# Altium PCB 5025_拼.PcbDoc
Units mm, origin at the board's own origin, x right, y up, seen from the top; angles counter-clockwise.
Board outline 100 x 100 mm, 2 copper layers (Top Layer, Bottom Layer); 136 components, 0 nets, 304 pads, 1408 vias.
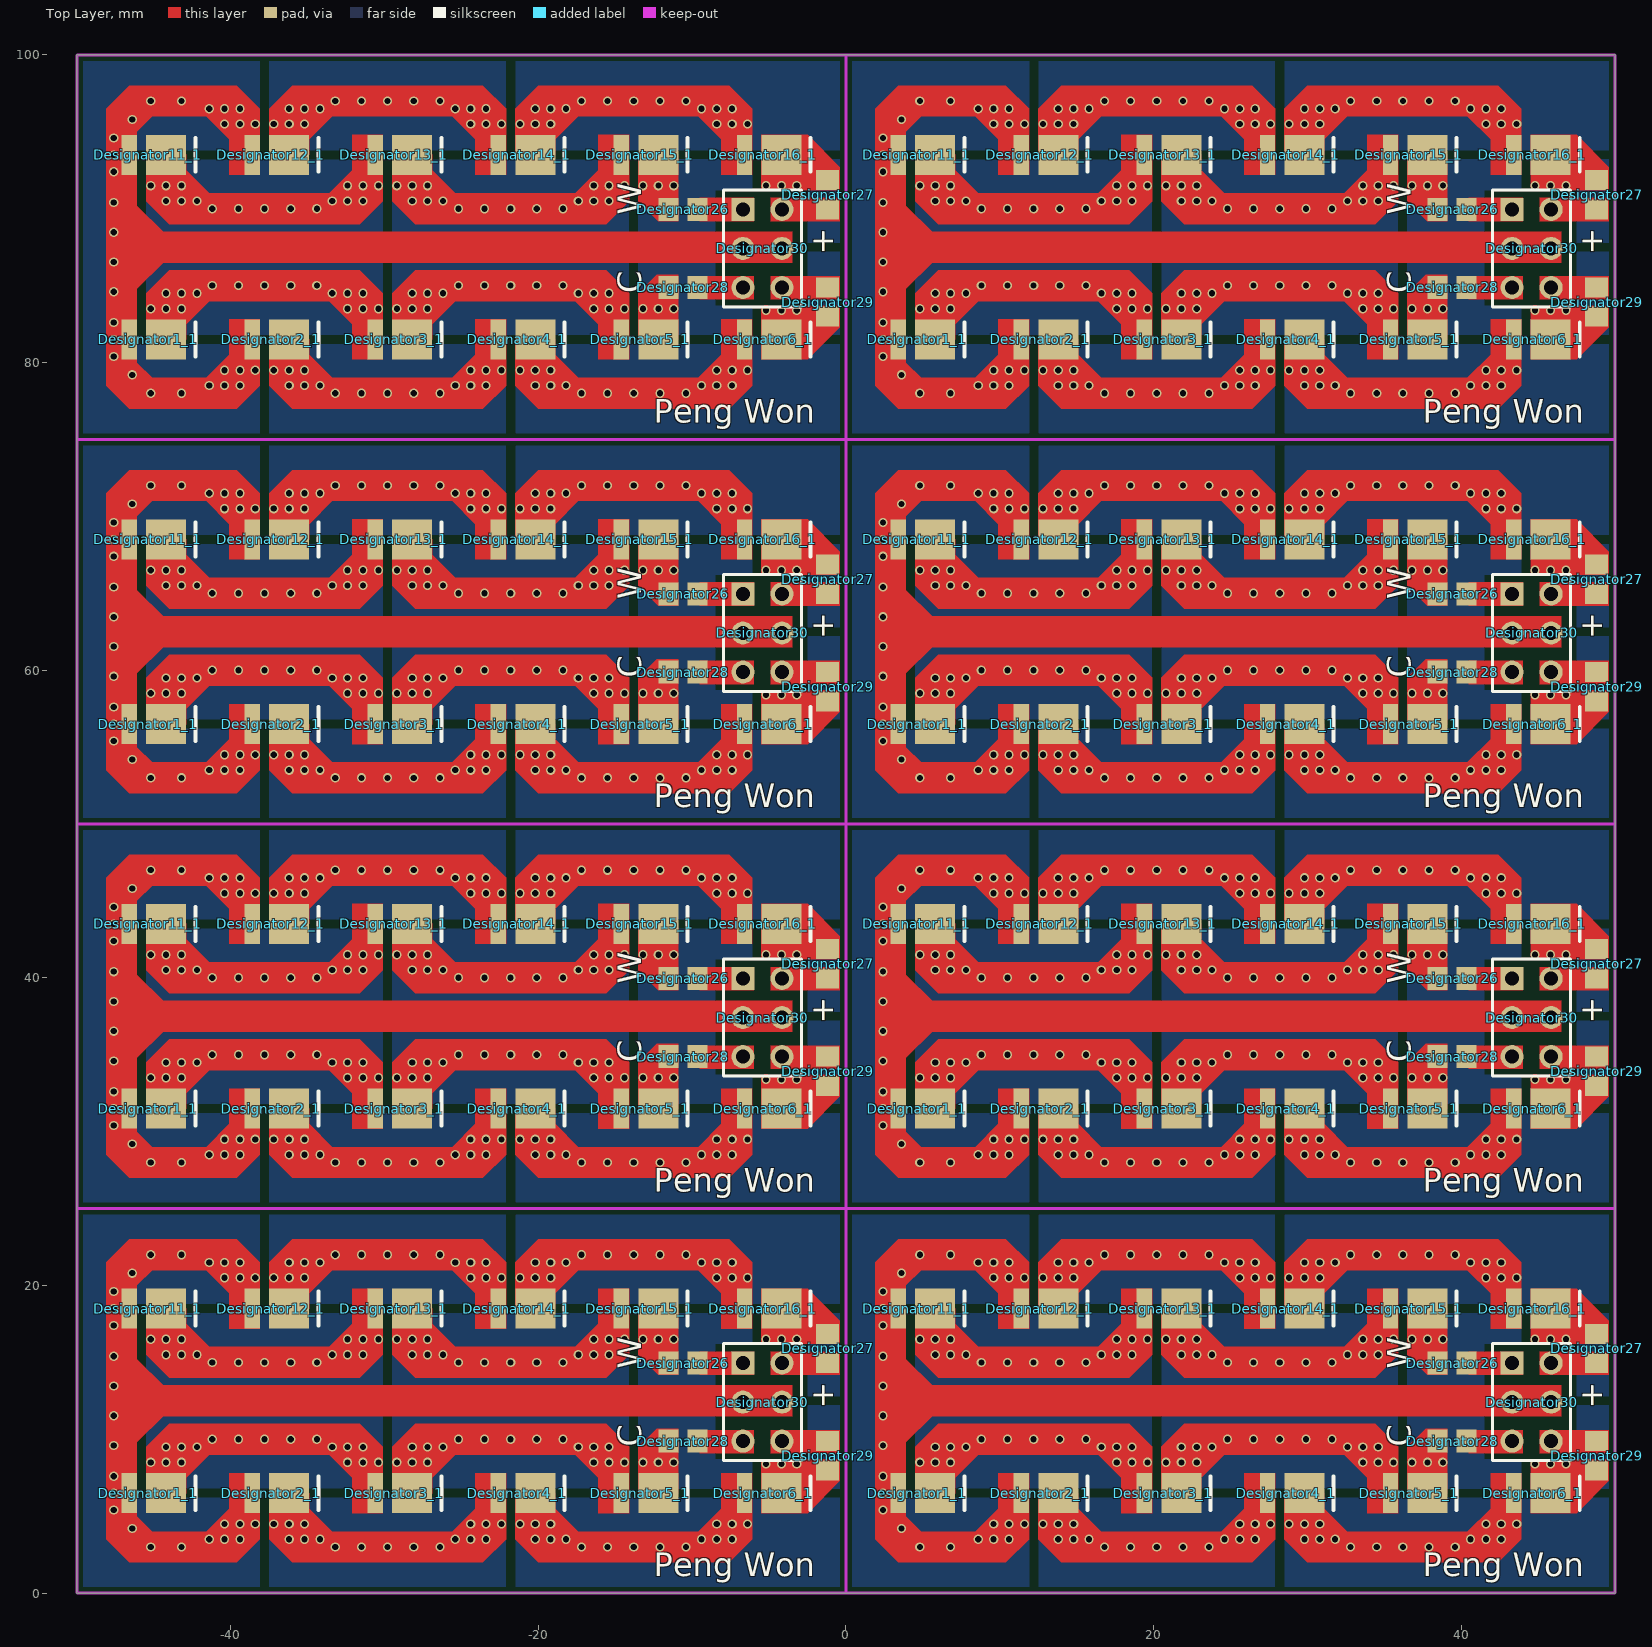
[diagram p0: Top Layer view]
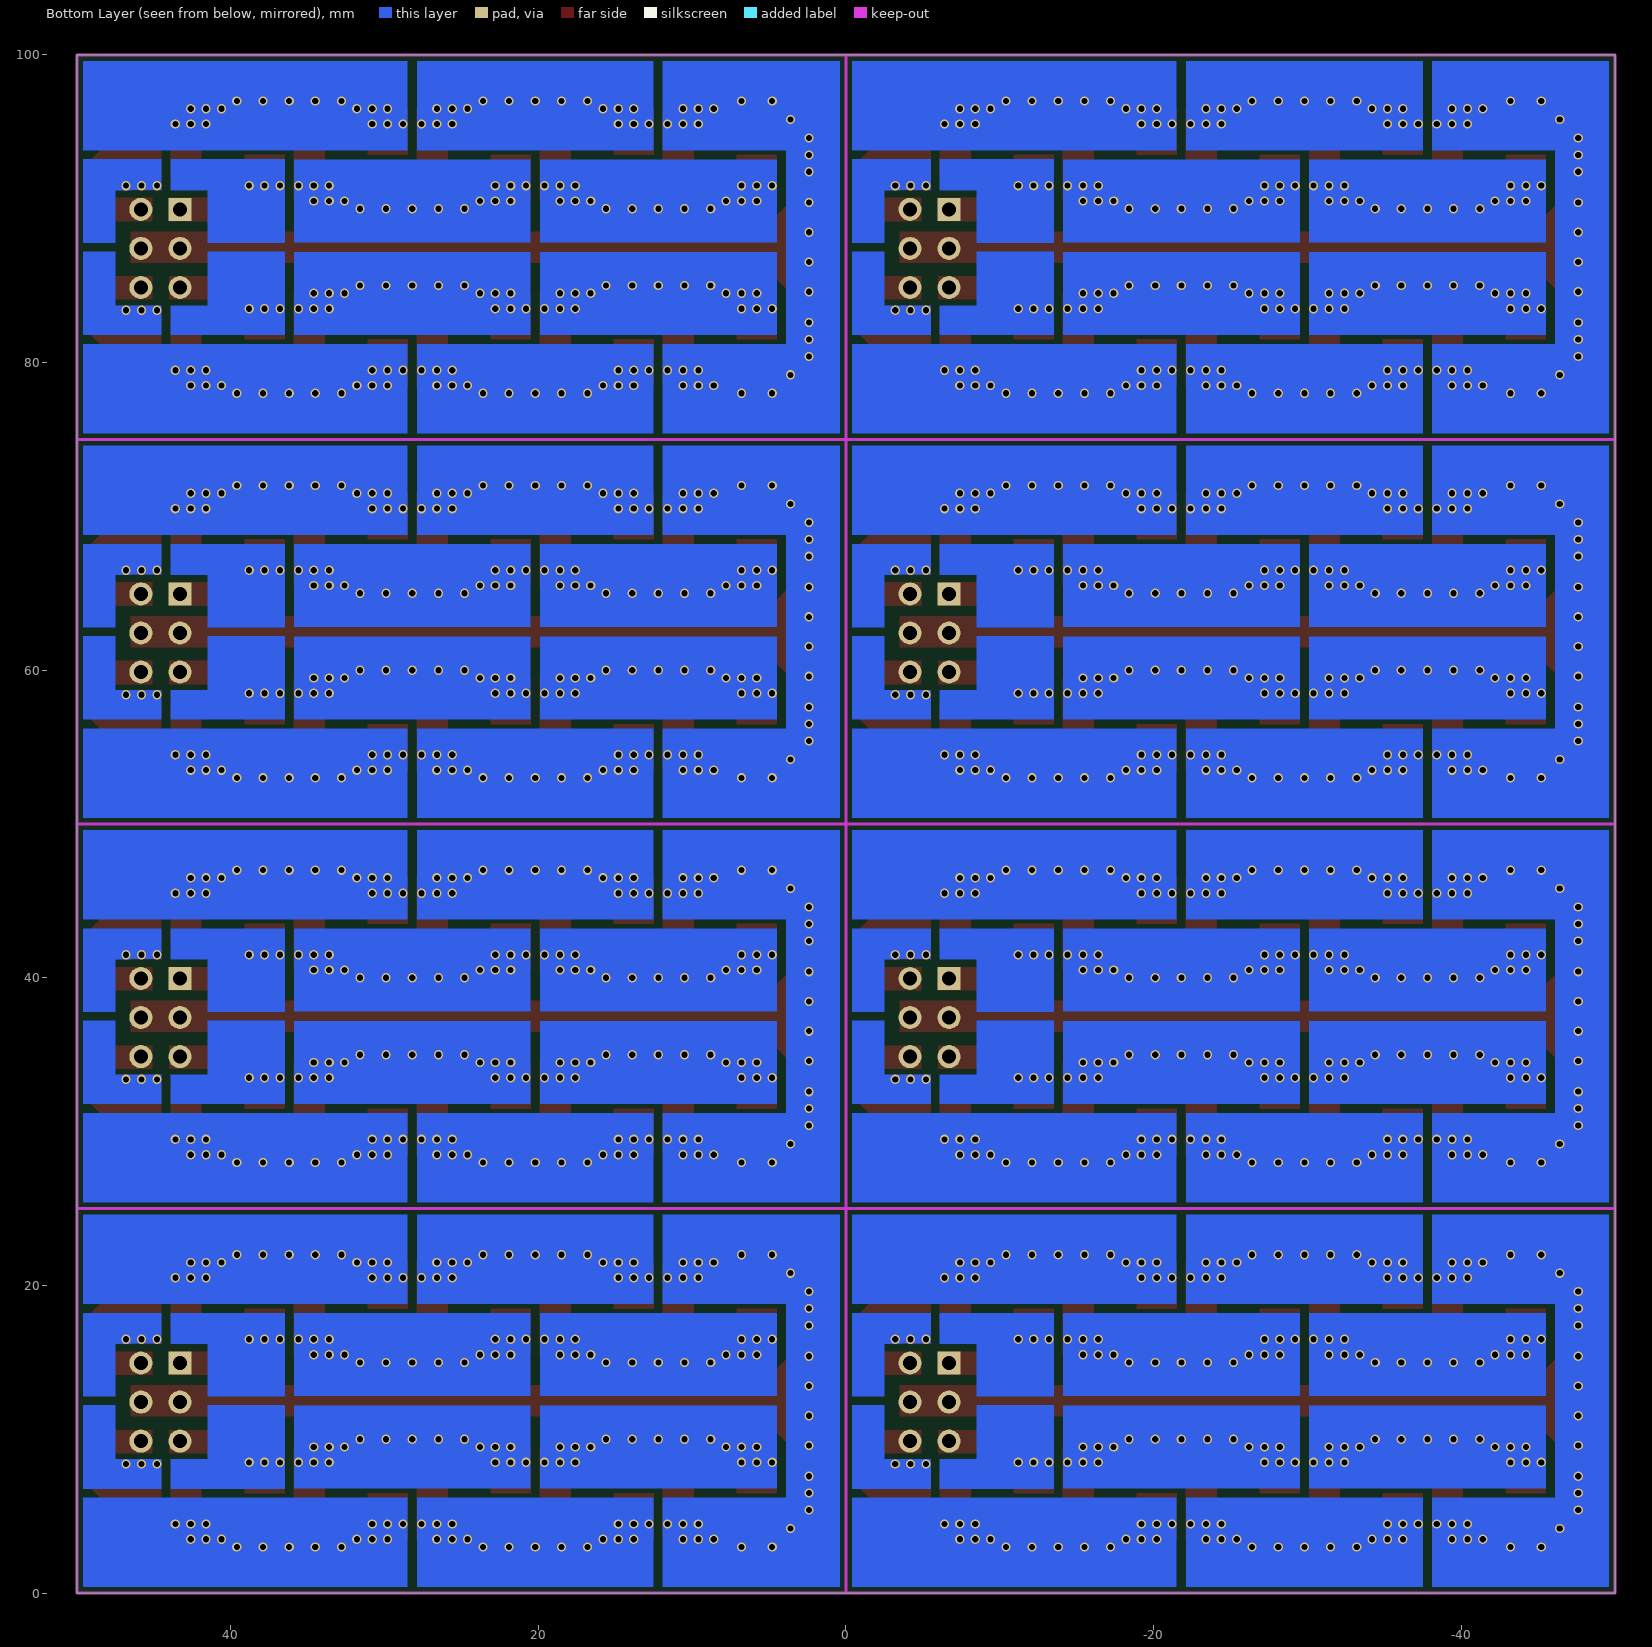
[diagram p1: Bottom Layer view, seen from below]

## Layer stack, top to bottom
Top Layer: signal copper 0.0356
Dielectric: dielectric 0.32, FR-4, Dk 4.8
Bottom Layer: signal copper 0.0356

## Board outline
-50,0 -50,100 50,100 50,0

## Design rules (kind name [scope] priority, off if disabled: settings)
Clearance [All] p1: gap=0.254
PolygonConnect [All] p1: connectstyle=Relief reliefconductorwidth=0.254 reliefentries=4 polygonreliefangle="90 Angle"
RoutingVias [All] p1: holewidth=0.711 width=1.27 viastyle="Through Hole" minholewidth=0.711 minwidth=1.27 maxholewidth=0.711 maxwidth=1.27
SilkscreenOverComponentPads [All] p1: minsilkscreentomaskgap=0.254
SolderMaskExpansion [All] p1: expansion=0.102
Width [All] p1: maxlimit=0.254 minlimit=0.254 preferedwidth=0.254
27 further rules are at their usual default settings.

## Components (designator, comment, footprint, x,y, rotation, side; value= is the part's Value field where it differs from the comment)
Designator1_1 "Comment" 2835 -45,6.5 r0 top
Designator1_1 "Comment" 2835 -45,31.5 r0 top
Designator1_1 "Comment" 2835 -45,56.5 r0 top
Designator1_1 "Comment" 2835 -45,81.5 r0 top
Designator1_1 "Comment" 2835 5,81.5 r0 top
Designator1_1 "Comment" 2835 5,56.5 r0 top
Designator1_1 "Comment" 2835 5,31.5 r0 top
Designator1_1 "Comment" 2835 5,6.5 r0 top
Designator2_1 "Comment" 2835 -37,6.5 r0 top
Designator2_1 "Comment" 2835 -37,31.5 r0 top
Designator2_1 "Comment" 2835 -37,56.5 r0 top
Designator2_1 "Comment" 2835 -37,81.5 r0 top
Designator2_1 "Comment" 2835 13,81.5 r0 top
Designator2_1 "Comment" 2835 13,56.5 r0 top
Designator2_1 "Comment" 2835 13,31.5 r0 top
Designator2_1 "Comment" 2835 13,6.5 r0 top
Designator3_1 "Comment" 2835 -29,6.5 r0 top
Designator3_1 "Comment" 2835 -29,31.5 r0 top
Designator3_1 "Comment" 2835 -29,56.5 r0 top
Designator3_1 "Comment" 2835 -29,81.5 r0 top
Designator3_1 "Comment" 2835 21,81.5 r0 top
Designator3_1 "Comment" 2835 21,56.5 r0 top
Designator3_1 "Comment" 2835 21,31.5 r0 top
Designator3_1 "Comment" 2835 21,6.5 r0 top
Designator4_1 "Comment" 2835 -21,6.5 r0 top
Designator4_1 "Comment" 2835 -21,31.5 r0 top
Designator4_1 "Comment" 2835 -21,56.5 r0 top
Designator4_1 "Comment" 2835 -21,81.5 r0 top
Designator4_1 "Comment" 2835 29,81.5 r0 top
Designator4_1 "Comment" 2835 29,56.5 r0 top
Designator4_1 "Comment" 2835 29,31.5 r0 top
Designator4_1 "Comment" 2835 29,6.5 r0 top
Designator5_1 "Comment" 2835 -13,6.5 r0 top
Designator5_1 "Comment" 2835 -13,31.5 r0 top
Designator5_1 "Comment" 2835 -13,56.5 r0 top
Designator5_1 "Comment" 2835 -13,81.5 r0 top
Designator5_1 "Comment" 2835 37,81.5 r0 top
Designator5_1 "Comment" 2835 37,56.5 r0 top
Designator5_1 "Comment" 2835 37,31.5 r0 top
Designator5_1 "Comment" 2835 37,6.5 r0 top
Designator6_1 "Comment" 2835 -5,6.5 r0 top
Designator6_1 "Comment" 2835 -5,31.5 r0 top
Designator6_1 "Comment" 2835 -5,56.5 r0 top
Designator6_1 "Comment" 2835 -5,81.5 r0 top
Designator6_1 "Comment" 2835 45,81.5 r0 top
Designator6_1 "Comment" 2835 45,56.5 r0 top
Designator6_1 "Comment" 2835 45,31.5 r0 top
Designator6_1 "Comment" 2835 45,6.5 r0 top
Designator11_1 "Comment" 2835 -45,18.5 r0 top
Designator11_1 "Comment" 2835 -45,43.5 r0 top
Designator11_1 "Comment" 2835 -45,68.5 r0 top
Designator11_1 "Comment" 2835 -45,93.5 r0 top
Designator11_1 "Comment" 2835 5,93.5 r0 top
Designator11_1 "Comment" 2835 5,68.5 r0 top
Designator11_1 "Comment" 2835 5,43.5 r0 top
Designator11_1 "Comment" 2835 5,18.5 r0 top
Designator12_1 "Comment" 2835 -37,18.5 r0 top
Designator12_1 "Comment" 2835 -37,43.5 r0 top
Designator12_1 "Comment" 2835 -37,68.5 r0 top
Designator12_1 "Comment" 2835 -37,93.5 r0 top
Designator12_1 "Comment" 2835 13,93.5 r0 top
Designator12_1 "Comment" 2835 13,68.5 r0 top
Designator12_1 "Comment" 2835 13,43.5 r0 top
Designator12_1 "Comment" 2835 13,18.5 r0 top
Designator13_1 "Comment" 2835 -29,18.5 r0 top
Designator13_1 "Comment" 2835 -29,43.5 r0 top
Designator13_1 "Comment" 2835 -29,68.5 r0 top
Designator13_1 "Comment" 2835 -29,93.5 r0 top
Designator13_1 "Comment" 2835 21,93.5 r0 top
Designator13_1 "Comment" 2835 21,68.5 r0 top
Designator13_1 "Comment" 2835 21,43.5 r0 top
Designator13_1 "Comment" 2835 21,18.5 r0 top
Designator14_1 "Comment" 2835 -21,18.5 r0 top
Designator14_1 "Comment" 2835 -21,43.5 r0 top
Designator14_1 "Comment" 2835 -21,68.5 r0 top
Designator14_1 "Comment" 2835 -21,93.5 r0 top
Designator14_1 "Comment" 2835 29,93.5 r0 top
Designator14_1 "Comment" 2835 29,68.5 r0 top
Designator14_1 "Comment" 2835 29,43.5 r0 top
Designator14_1 "Comment" 2835 29,18.5 r0 top
Designator15_1 "Comment" 2835 -13,18.5 r0 top
Designator15_1 "Comment" 2835 -13,43.5 r0 top
Designator15_1 "Comment" 2835 -13,68.5 r0 top
Designator15_1 "Comment" 2835 -13,93.5 r0 top
Designator15_1 "Comment" 2835 37,93.5 r0 top
Designator15_1 "Comment" 2835 37,68.5 r0 top
Designator15_1 "Comment" 2835 37,43.5 r0 top
Designator15_1 "Comment" 2835 37,18.5 r0 top
Designator16_1 "Comment" 2835 -5,18.5 r0 top
Designator16_1 "Comment" 2835 -5,43.5 r0 top
Designator16_1 "Comment" 2835 -5,68.5 r0 top
Designator16_1 "Comment" 2835 -5,93.5 r0 top
Designator16_1 "Comment" 2835 45,93.5 r0 top
Designator16_1 "Comment" 2835 45,68.5 r0 top
Designator16_1 "Comment" 2835 45,43.5 r0 top
Designator16_1 "Comment" 2835 45,18.5 r0 top
Designator26 "Comment" 2012[0805] -10.6,14.958 r0 top
Designator26 "Comment" 2012[0805] -10.6,39.958 r0 top
Designator26 "Comment" 2012[0805] -10.6,64.958 r0 top
Designator26 "Comment" 2012[0805] -10.6,89.958 r0 top
Designator26 "Comment" 2012[0805] 39.4,89.958 r0 top
Designator26 "Comment" 2012[0805] 39.4,64.958 r0 top
Designator26 "Comment" 2012[0805] 39.4,39.958 r0 top
Designator26 "Comment" 2012[0805] 39.4,14.958 r0 top
Designator27 "Comment" 2012[0805] -1.2,15.908 r270 top
Designator27 "Comment" 2012[0805] -1.2,40.908 r270 top
Designator27 "Comment" 2012[0805] -1.2,65.908 r270 top
Designator27 "Comment" 2012[0805] -1.2,90.908 r270 top
Designator27 "Comment" 2012[0805] 48.8,90.908 r270 top
Designator27 "Comment" 2012[0805] 48.8,65.908 r270 top
Designator27 "Comment" 2012[0805] 48.8,40.908 r270 top
Designator27 "Comment" 2012[0805] 48.8,15.908 r270 top
Designator28 "Comment" 2012[0805] -10.6,9.878 r0 top
Designator28 "Comment" 2012[0805] -10.6,34.878 r0 top
Designator28 "Comment" 2012[0805] -10.6,59.878 r0 top
Designator28 "Comment" 2012[0805] -10.6,84.878 r0 top
Designator28 "Comment" 2012[0805] 39.4,84.878 r0 top
Designator28 "Comment" 2012[0805] 39.4,59.878 r0 top
Designator28 "Comment" 2012[0805] 39.4,34.878 r0 top
Designator28 "Comment" 2012[0805] 39.4,9.878 r0 top
Designator29 "Comment" 2012[0805] -1.2,8.928 r90 top
Designator29 "Comment" 2012[0805] -1.2,33.928 r90 top
Designator29 "Comment" 2012[0805] -1.2,58.928 r90 top
Designator29 "Comment" 2012[0805] -1.2,83.928 r90 top
Designator29 "Comment" 2012[0805] 48.8,83.928 r90 top
Designator29 "Comment" 2012[0805] 48.8,58.928 r90 top
Designator29 "Comment" 2012[0805] 48.8,33.928 r90 top
Designator29 "Comment" 2012[0805] 48.8,8.928 r90 top
Designator30 "Comment" HDR2X3 -6.7,14.958 r270 top
Designator30 "Comment" HDR2X3 -6.7,39.958 r270 top
Designator30 "Comment" HDR2X3 -6.7,64.958 r270 top
Designator30 "Comment" HDR2X3 -6.7,89.958 r270 top
Designator30 "Comment" HDR2X3 43.3,89.958 r270 top
Designator30 "Comment" HDR2X3 43.3,64.958 r270 top
Designator30 "Comment" HDR2X3 43.3,39.958 r270 top
Designator30 "Comment" HDR2X3 43.3,14.958 r270 top

## Footprints (in the part's own frame and the unit in brackets; to place one, negate y for a bottom-side part, rotate by r counter-clockwise, add the part's x,y. Pads: shape width x height; smd on the part's side, far side on the other; paste and mask are expansions set on the pad)
2012[0805] [mm] "Chip Resistor; Body 2.0 x 1.3 mm (LxW typ)"
  rect 1.3x1.5 smd: 1(-0.95,0) 2(0.95,0)
2835 [mm]
  rect 2.6x2.6 smd: 1(0.8,0)
  rect 1x2.6 smd: 2(-1.6,0)
  silkscreen extent 2.7,-1.1 2.7,1.1, body extent -1.65,-1.4 1.65,1.4, height 0.8
HDR2X3 [mm] "Connector; Header; 3x2 Position"
  rect 1.5x1.5 hole 0.9: 1(0,0)
  round 1.5 hole 0.9: 2(0,2.54) 3(2.54,0) 4(2.54,2.54) 5(5.08,0) 6(5.08,2.54)
  silkscreen extent -1.27,-1.27 6.35,3.81

## Via types
v1: diameter 0.6, hole 0.4, Top Layer to Bottom Layer, tented both sides, 1408 vias

## Nets (pads, with @x,y where several pads share a name; then routed paths per layer and width w, separated by ;. In a path a pad name is that pad's centre, name@x,y a point inside that pad or via, vN(x,y) a via of type N, cw(c..) or ccw(c..) an arc to the next point about the centre after c; other vN are vias at no path point)
pads on no net: Designator1_1.1 Designator1_1.2 Designator2_1.1 Designator2_1.2 Designator3_1.1 Designator3_1.2 Designator4_1.1 Designator4_1.2 Designator5_1.1 Designator5_1.2 Designator6_1.1 Designator6_1.2 Designator11_1.1 Designator11_1.2 Designator12_1.1 Designator12_1.2 Designator13_1.1 Designator13_1.2 Designator14_1.1 Designator14_1.2 Designator15_1.1 Designator15_1.2 Designator16_1.1 Designator16_1.2 Designator26.1 Designator26.2 Designator27.1 Designator27.2 Designator28.1 Designator28.2 Designator29.1 Designator29.2 Designator30.1 Designator30.2 Designator30.3 Designator30.4 Designator30.5 Designator30.6
copper on no net:
  other v1: -45.2,3 -43.2,3 -33.2,3 -31.5,3 -29.8,3 -28.1,3 -26.4,3 -17.2,3 -15.5,3 -13.8,3 -12.1,3 -10.4,3 4.8,3 6.8,3 16.8,3 18.5,3 20.2,3 21.9,3 23.6,3 32.8,3 34.5,3 36.2,3 37.9,3 39.6,3 -41.4,3.5 -40.4,3.5 -39.4,3.5 -36.2,3.5 -35.2,3.5 -34.2,3.5 -25.4,3.5 -24.4,3.5 -23.4,3.5 -20.2,3.5 -19.2,3.5 -18.2,3.5 -9.4,3.5 -8.4,3.5 -7.4,3.5 8.6,3.5 9.6,3.5 10.6,3.5 13.8,3.5 14.8,3.5 15.8,3.5 24.6,3.5 25.6,3.5 26.6,3.5 29.8,3.5 30.8,3.5 31.8,3.5 40.6,3.5 41.6,3.5 42.6,3.5 -46.4,4.2 3.6,4.2 -40.4,4.5 -39.4,4.5 -38.4,4.5 -37.2,4.5 -36.2,4.5 -35.2,4.5 -24.4,4.5 -23.4,4.5 -22.4,4.5 -21.2,4.5 -20.2,4.5 -19.2,4.5 -8.4,4.5 -7.4,4.5 -6.4,4.5 9.6,4.5 10.6,4.5 11.6,4.5 12.8,4.5 13.8,4.5 14.8,4.5 25.6,4.5 26.6,4.5 27.6,4.5 28.8,4.5 29.8,4.5 30.8,4.5 41.6,4.5 42.6,4.5 43.6,4.5 -47.6,5.4 2.4,5.4 -47.6,6.5 2.4,6.5 -47.6,7.6 2.4,7.6 -5.2,8.4 -4.2,8.4 -3.2,8.4 44.8,8.4 45.8,8.4 46.8,8.4 -45.2,8.5 -44.2,8.5 -43.2,8.5 -32.4,8.5 -31.4,8.5 -30.4,8.5 -29.2,8.5 -28.2,8.5 -27.2,8.5 -16.4,8.5 -15.4,8.5 -14.4,8.5 -13.2,8.5 -12.2,8.5 -11.2,8.5 4.8,8.5 5.8,8.5 6.8,8.5 17.6,8.5 18.6,8.5 19.6,8.5 20.8,8.5 21.8,8.5 22.8,8.5 33.6,8.5 34.6,8.5 35.6,8.5 36.8,8.5 37.8,8.5 38.8,8.5 -44.2,9.5 -43.2,9.5 -42.2,9.5 -33.4,9.5 -32.4,9.5 -31.4,9.5 -28.2,9.5 -27.2,9.5 -26.2,9.5 -17.4,9.5 -16.4,9.5 -15.4,9.5 5.8,9.5 6.8,9.5 7.8,9.5 16.6,9.5 17.6,9.5 18.6,9.5 21.8,9.5 22.8,9.5 23.8,9.5 32.6,9.5 33.6,9.5 34.6,9.5 -47.6,9.6 2.4,9.6 -41.2,10 -39.5,10 -37.8,10 -36.1,10 -34.4,10 -25.2,10 -23.5,10 -21.8,10 -20.1,10 -18.4,10 8.8,10 10.5,10 12.2,10 13.9,10 15.6,10 24.8,10 26.5,10 28.2,10 29.9,10 31.6,10 -47.6,11.533 2.4,11.533 -47.6,13.467 2.4,13.467 -41.2,15 -39.5,15 -37.8,15 -36.1,15 -34.4,15 -25.2,15 -23.5,15 -21.8,15 -20.1,15 -18.4,15 8.8,15 10.5,15 12.2,15 13.9,15 15.6,15 24.8,15 26.5,15 28.2,15 29.9,15 31.6,15 -47.6,15.4 2.4,15.4 -44.2,15.5 -43.2,15.5 -42.2,15.5 -33.4,15.5 -32.4,15.5 -31.4,15.5 -28.2,15.5 -27.2,15.5 -26.2,15.5 -17.4,15.5 -16.4,15.5 -15.4,15.5 5.8,15.5 6.8,15.5 7.8,15.5 16.6,15.5 17.6,15.5 18.6,15.5 21.8,15.5 22.8,15.5 23.8,15.5 32.6,15.5 33.6,15.5 34.6,15.5 -45.2,16.5 -44.2,16.5 -43.2,16.5 -32.4,16.5 -31.4,16.5 -30.4,16.5 -29.2,16.5 -28.2,16.5 -27.2,16.5 -16.4,16.5 -15.4,16.5 -14.4,16.5 -13.2,16.5 -12.2,16.5 -11.2,16.5 -5.2,16.5 -4.2,16.5 -3.2,16.5 4.8,16.5 5.8,16.5 6.8,16.5 17.6,16.5 18.6,16.5 19.6,16.5 20.8,16.5 21.8,16.5 22.8,16.5 33.6,16.5 34.6,16.5 35.6,16.5 36.8,16.5 37.8,16.5 38.8,16.5 44.8,16.5 45.8,16.5 46.8,16.5 -47.6,17.4 2.4,17.4 -47.6,18.5 2.4,18.5 -47.6,19.6 2.4,19.6 -40.4,20.5 -39.4,20.5 -38.4,20.5 -37.2,20.5 -36.2,20.5 -35.2,20.5 -24.4,20.5 -23.4,20.5 -22.4,20.5 -21.2,20.5 -20.2,20.5 -19.2,20.5 -8.4,20.5 -7.4,20.5 -6.4,20.5 9.6,20.5 10.6,20.5 11.6,20.5 12.8,20.5 13.8,20.5 14.8,20.5 25.6,20.5 26.6,20.5 27.6,20.5 28.8,20.5 29.8,20.5 30.8,20.5 41.6,20.5 42.6,20.5 43.6,20.5 -46.4,20.8 3.6,20.8 -41.4,21.5 -40.4,21.5 -39.4,21.5 -36.2,21.5 -35.2,21.5 -34.2,21.5 -25.4,21.5 -24.4,21.5 -23.4,21.5 -20.2,21.5 -19.2,21.5 -18.2,21.5 -9.4,21.5 -8.4,21.5 -7.4,21.5 8.6,21.5 9.6,21.5 10.6,21.5 13.8,21.5 14.8,21.5 15.8,21.5 24.6,21.5 25.6,21.5 26.6,21.5 29.8,21.5 30.8,21.5 31.8,21.5 40.6,21.5 41.6,21.5 42.6,21.5 -45.2,22 -43.2,22 -33.2,22 -31.5,22 -29.8,22 -28.1,22 -26.4,22 -17.2,22 -15.5,22 -13.8,22 -12.1,22 -10.4,22 4.8,22 6.8,22 16.8,22 18.5,22 20.2,22 21.9,22 23.6,22 32.8,22 34.5,22 36.2,22 37.9,22 39.6,22 -45.2,28 -43.2,28 -33.2,28 -31.5,28 -29.8,28 -28.1,28 -26.4,28 -17.2,28 -15.5,28 -13.8,28 -12.1,28 -10.4,28 4.8,28 6.8,28 16.8,28 18.5,28 20.2,28 21.9,28 23.6,28 32.8,28 34.5,28 36.2,28 37.9,28 39.6,28 -41.4,28.5 -40.4,28.5 -39.4,28.5 -36.2,28.5 -35.2,28.5 -34.2,28.5 -25.4,28.5 -24.4,28.5 -23.4,28.5 -20.2,28.5 -19.2,28.5 -18.2,28.5 -9.4,28.5 -8.4,28.5 -7.4,28.5 8.6,28.5 9.6,28.5 10.6,28.5 13.8,28.5 14.8,28.5 15.8,28.5 24.6,28.5 25.6,28.5 26.6,28.5 29.8,28.5 30.8,28.5 31.8,28.5 40.6,28.5 41.6,28.5 42.6,28.5 -46.4,29.2 3.6,29.2 -40.4,29.5 -39.4,29.5 -38.4,29.5 -37.2,29.5 -36.2,29.5 -35.2,29.5 -24.4,29.5 -23.4,29.5 -22.4,29.5 -21.2,29.5 -20.2,29.5 -19.2,29.5 -8.4,29.5 -7.4,29.5 -6.4,29.5 9.6,29.5 10.6,29.5 11.6,29.5 12.8,29.5 13.8,29.5 14.8,29.5 25.6,29.5 26.6,29.5 27.6,29.5 28.8,29.5 29.8,29.5 30.8,29.5 41.6,29.5 42.6,29.5 43.6,29.5 -47.6,30.4 2.4,30.4 -47.6,31.5 2.4,31.5 -47.6,32.6 2.4,32.6 -5.2,33.4 -4.2,33.4 -3.2,33.4 44.8,33.4 45.8,33.4 46.8,33.4 -45.2,33.5 -44.2,33.5 -43.2,33.5 -32.4,33.5 -31.4,33.5 -30.4,33.5 -29.2,33.5 -28.2,33.5 -27.2,33.5 -16.4,33.5 -15.4,33.5 -14.4,33.5 -13.2,33.5 -12.2,33.5 -11.2,33.5 4.8,33.5 5.8,33.5 6.8,33.5 17.6,33.5 18.6,33.5 19.6,33.5 20.8,33.5 21.8,33.5 22.8,33.5 33.6,33.5 34.6,33.5 35.6,33.5 36.8,33.5 37.8,33.5 38.8,33.5 -44.2,34.5 -43.2,34.5 -42.2,34.5 -33.4,34.5 -32.4,34.5 -31.4,34.5 -28.2,34.5 -27.2,34.5 -26.2,34.5 -17.4,34.5 -16.4,34.5 -15.4,34.5 5.8,34.5 6.8,34.5 7.8,34.5 16.6,34.5 17.6,34.5 18.6,34.5 21.8,34.5 22.8,34.5 23.8,34.5 32.6,34.5 33.6,34.5 34.6,34.5 -47.6,34.6 2.4,34.6 -41.2,35 -39.5,35 -37.8,35 -36.1,35 -34.4,35 -25.2,35 -23.5,35 -21.8,35 -20.1,35 -18.4,35 8.8,35 10.5,35 12.2,35 13.9,35 15.6,35 24.8,35 26.5,35 28.2,35 29.9,35 31.6,35 -47.6,36.533 2.4,36.533 -47.6,38.467 2.4,38.467 -41.2,40 -39.5,40 -37.8,40 -36.1,40 -34.4,40 -25.2,40 -23.5,40 -21.8,40 -20.1,40 -18.4,40 8.8,40 10.5,40 12.2,40 13.9,40 15.6,40 24.8,40 26.5,40 28.2,40 29.9,40 31.6,40 -47.6,40.4 2.4,40.4 -44.2,40.5 -43.2,40.5 -42.2,40.5 -33.4,40.5 -32.4,40.5 -31.4,40.5 -28.2,40.5 -27.2,40.5 -26.2,40.5 -17.4,40.5 -16.4,40.5 -15.4,40.5 5.8,40.5 6.8,40.5 7.8,40.5 16.6,40.5 17.6,40.5 18.6,40.5 21.8,40.5 22.8,40.5 23.8,40.5 32.6,40.5 33.6,40.5 34.6,40.5 -45.2,41.5 -44.2,41.5 -43.2,41.5 -32.4,41.5 -31.4,41.5 -30.4,41.5 -29.2,41.5 -28.2,41.5 -27.2,41.5 -16.4,41.5 -15.4,41.5 -14.4,41.5 -13.2,41.5 -12.2,41.5 -11.2,41.5 -5.2,41.5 -4.2,41.5 -3.2,41.5 4.8,41.5 5.8,41.5 6.8,41.5 17.6,41.5 18.6,41.5 19.6,41.5 20.8,41.5 21.8,41.5 22.8,41.5 33.6,41.5 34.6,41.5 35.6,41.5 36.8,41.5 37.8,41.5 38.8,41.5 44.8,41.5 45.8,41.5 46.8,41.5 -47.6,42.4 2.4,42.4 -47.6,43.5 2.4,43.5 -47.6,44.6 2.4,44.6 -40.4,45.5 -39.4,45.5 -38.4,45.5 -37.2,45.5 -36.2,45.5 -35.2,45.5 -24.4,45.5 -23.4,45.5 -22.4,45.5 -21.2,45.5 -20.2,45.5 -19.2,45.5 -8.4,45.5 -7.4,45.5 -6.4,45.5 9.6,45.5 10.6,45.5 11.6,45.5 12.8,45.5 13.8,45.5 14.8,45.5 25.6,45.5 26.6,45.5 27.6,45.5 28.8,45.5 29.8,45.5 30.8,45.5 41.6,45.5 42.6,45.5 43.6,45.5 -46.4,45.8 3.6,45.8 -41.4,46.5 -40.4,46.5 -39.4,46.5 -36.2,46.5 -35.2,46.5 -34.2,46.5 -25.4,46.5 -24.4,46.5 -23.4,46.5 -20.2,46.5 -19.2,46.5 -18.2,46.5 -9.4,46.5 -8.4,46.5 -7.4,46.5 8.6,46.5 9.6,46.5 10.6,46.5 13.8,46.5 14.8,46.5 15.8,46.5 24.6,46.5 25.6,46.5 26.6,46.5 29.8,46.5 30.8,46.5 31.8,46.5 40.6,46.5 41.6,46.5 42.6,46.5 -45.2,47 -43.2,47 -33.2,47 -31.5,47 -29.8,47 -28.1,47 -26.4,47 -17.2,47 -15.5,47 -13.8,47 -12.1,47 -10.4,47 4.8,47 6.8,47 16.8,47 18.5,47 20.2,47 21.9,47 23.6,47 32.8,47 34.5,47 36.2,47 37.9,47 39.6,47 -45.2,53 -43.2,53 -33.2,53 -31.5,53 -29.8,53 -28.1,53 -26.4,53 -17.2,53 -15.5,53 -13.8,53 -12.1,53 -10.4,53 4.8,53 6.8,53 16.8,53 18.5,53 20.2,53 21.9,53 23.6,53 32.8,53 34.5,53 36.2,53 37.9,53 39.6,53 -41.4,53.5 -40.4,53.5 -39.4,53.5 -36.2,53.5 -35.2,53.5 -34.2,53.5 -25.4,53.5 -24.4,53.5 -23.4,53.5 -20.2,53.5 -19.2,53.5 -18.2,53.5 -9.4,53.5 -8.4,53.5 -7.4,53.5 8.6,53.5 9.6,53.5 10.6,53.5 13.8,53.5 14.8,53.5 15.8,53.5 24.6,53.5 25.6,53.5 26.6,53.5 29.8,53.5 30.8,53.5 31.8,53.5 40.6,53.5 41.6,53.5 42.6,53.5 -46.4,54.2 3.6,54.2 -40.4,54.5 -39.4,54.5 -38.4,54.5 -37.2,54.5 -36.2,54.5 -35.2,54.5 -24.4,54.5 -23.4,54.5 -22.4,54.5 -21.2,54.5 -20.2,54.5 -19.2,54.5 -8.4,54.5 -7.4,54.5 -6.4,54.5 9.6,54.5 10.6,54.5 11.6,54.5 12.8,54.5 13.8,54.5 14.8,54.5 25.6,54.5 26.6,54.5 27.6,54.5 28.8,54.5 29.8,54.5 30.8,54.5 41.6,54.5 42.6,54.5 43.6,54.5 -47.6,55.4 2.4,55.4 -47.6,56.5 2.4,56.5 -47.6,57.6 2.4,57.6 -5.2,58.4 -4.2,58.4 -3.2,58.4 44.8,58.4 45.8,58.4 46.8,58.4 -45.2,58.5 -44.2,58.5 -43.2,58.5 -32.4,58.5 -31.4,58.5 -30.4,58.5 -29.2,58.5 -28.2,58.5 -27.2,58.5 -16.4,58.5 -15.4,58.5 -14.4,58.5 -13.2,58.5 -12.2,58.5 -11.2,58.5 4.8,58.5 5.8,58.5 6.8,58.5 17.6,58.5 18.6,58.5 19.6,58.5 20.8,58.5 21.8,58.5 22.8,58.5 33.6,58.5 34.6,58.5 35.6,58.5 36.8,58.5 37.8,58.5 38.8,58.5 -44.2,59.5 -43.2,59.5 -42.2,59.5 -33.4,59.5 -32.4,59.5 -31.4,59.5 -28.2,59.5 -27.2,59.5 -26.2,59.5 -17.4,59.5 -16.4,59.5 -15.4,59.5 5.8,59.5 6.8,59.5 7.8,59.5 16.6,59.5 17.6,59.5 18.6,59.5 21.8,59.5 22.8,59.5 23.8,59.5 32.6,59.5 33.6,59.5 34.6,59.5 -47.6,59.6 2.4,59.6 -41.2,60 -39.5,60 -37.8,60 -36.1,60 -34.4,60 -25.2,60 -23.5,60 -21.8,60 -20.1,60 -18.4,60 8.8,60 10.5,60 12.2,60 13.9,60 15.6,60 24.8,60 26.5,60 28.2,60 29.9,60 31.6,60 -47.6,61.533 2.4,61.533 -47.6,63.467 2.4,63.467 -41.2,65 -39.5,65 -37.8,65 -36.1,65 -34.4,65 -25.2,65 -23.5,65 -21.8,65 -20.1,65 -18.4,65 8.8,65 10.5,65 12.2,65 13.9,65 15.6,65 24.8,65 26.5,65 28.2,65 29.9,65 31.6,65 -47.6,65.4 2.4,65.4 -44.2,65.5 -43.2,65.5 -42.2,65.5 -33.4,65.5 -32.4,65.5 -31.4,65.5 -28.2,65.5 -27.2,65.5 -26.2,65.5 -17.4,65.5 -16.4,65.5 -15.4,65.5 5.8,65.5 6.8,65.5 7.8,65.5 16.6,65.5 17.6,65.5 18.6,65.5 21.8,65.5 22.8,65.5 23.8,65.5 32.6,65.5 33.6,65.5 34.6,65.5 -45.2,66.5 -44.2,66.5 -43.2,66.5 -32.4,66.5 -31.4,66.5 -30.4,66.5 -29.2,66.5 -28.2,66.5 -27.2,66.5 -16.4,66.5 -15.4,66.5 -14.4,66.5 -13.2,66.5 -12.2,66.5 -11.2,66.5 -5.2,66.5 -4.2,66.5 -3.2,66.5 4.8,66.5 5.8,66.5 6.8,66.5 17.6,66.5 18.6,66.5 19.6,66.5 20.8,66.5 21.8,66.5 22.8,66.5 33.6,66.5 34.6,66.5 35.6,66.5 36.8,66.5 37.8,66.5 38.8,66.5 44.8,66.5 45.8,66.5 46.8,66.5 -47.6,67.4 2.4,67.4 -47.6,68.5 2.4,68.5 -47.6,69.6 2.4,69.6 -40.4,70.5 -39.4,70.5 -38.4,70.5 -37.2,70.5 -36.2,70.5 -35.2,70.5 -24.4,70.5 -23.4,70.5 -22.4,70.5 -21.2,70.5 -20.2,70.5 -19.2,70.5 -8.4,70.5 -7.4,70.5 -6.4,70.5 9.6,70.5 10.6,70.5 11.6,70.5 12.8,70.5 13.8,70.5 14.8,70.5 25.6,70.5 26.6,70.5 27.6,70.5 28.8,70.5 29.8,70.5 30.8,70.5 41.6,70.5 42.6,70.5 43.6,70.5 -46.4,70.8 3.6,70.8 -41.4,71.5 -40.4,71.5 -39.4,71.5 -36.2,71.5 -35.2,71.5 -34.2,71.5 -25.4,71.5 -24.4,71.5 -23.4,71.5 -20.2,71.5 -19.2,71.5 -18.2,71.5 -9.4,71.5 -8.4,71.5 -7.4,71.5 8.6,71.5 9.6,71.5 10.6,71.5 13.8,71.5 14.8,71.5 15.8,71.5 24.6,71.5 25.6,71.5 26.6,71.5 29.8,71.5 30.8,71.5 31.8,71.5 40.6,71.5 41.6,71.5 42.6,71.5 -45.2,72 -43.2,72 -33.2,72 -31.5,72 -29.8,72 -28.1,72 -26.4,72 -17.2,72 -15.5,72 -13.8,72 -12.1,72 -10.4,72 4.8,72 6.8,72 16.8,72 18.5,72 20.2,72 21.9,72 23.6,72 32.8,72 34.5,72 36.2,72 37.9,72 39.6,72 -45.2,78 -43.2,78 -33.2,78 -31.5,78 -29.8,78 -28.1,78 -26.4,78 -17.2,78 -15.5,78 -13.8,78 -12.1,78 -10.4,78 4.8,78 6.8,78 16.8,78 18.5,78 20.2,78 21.9,78 23.6,78 32.8,78 34.5,78 36.2,78 37.9,78 39.6,78 -41.4,78.5 -40.4,78.5 -39.4,78.5 -36.2,78.5 -35.2,78.5 -34.2,78.5 -25.4,78.5 -24.4,78.5 -23.4,78.5 -20.2,78.5 -19.2,78.5 -18.2,78.5 -9.4,78.5 -8.4,78.5 -7.4,78.5 8.6,78.5 9.6,78.5 10.6,78.5 13.8,78.5 14.8,78.5 15.8,78.5 24.6,78.5 25.6,78.5 26.6,78.5 29.8,78.5 30.8,78.5 31.8,78.5 40.6,78.5 41.6,78.5 42.6,78.5 -46.4,79.2 3.6,79.2 -40.4,79.5 -39.4,79.5 -38.4,79.5 -37.2,79.5 -36.2,79.5 -35.2,79.5 -24.4,79.5 -23.4,79.5 -22.4,79.5 -21.2,79.5 -20.2,79.5 -19.2,79.5 -8.4,79.5 -7.4,79.5 -6.4,79.5 9.6,79.5 10.6,79.5 11.6,79.5 12.8,79.5 13.8,79.5 14.8,79.5 25.6,79.5 26.6,79.5 27.6,79.5 28.8,79.5 29.8,79.5 30.8,79.5 41.6,79.5 42.6,79.5 43.6,79.5 -47.6,80.4 2.4,80.4 -47.6,81.5 2.4,81.5 -47.6,82.6 2.4,82.6 -5.2,83.4 -4.2,83.4 -3.2,83.4 44.8,83.4 45.8,83.4 46.8,83.4 -45.2,83.5 -44.2,83.5 -43.2,83.5 -32.4,83.5 -31.4,83.5 -30.4,83.5 -29.2,83.5 -28.2,83.5 -27.2,83.5 -16.4,83.5 -15.4,83.5 -14.4,83.5 -13.2,83.5 -12.2,83.5 -11.2,83.5 4.8,83.5 5.8,83.5 6.8,83.5 17.6,83.5 18.6,83.5 19.6,83.5 20.8,83.5 21.8,83.5 22.8,83.5 33.6,83.5 34.6,83.5 35.6,83.5 36.8,83.5 37.8,83.5 38.8,83.5 -44.2,84.5 -43.2,84.5 -42.2,84.5 -33.4,84.5 -32.4,84.5 -31.4,84.5 -28.2,84.5 -27.2,84.5 -26.2,84.5 -17.4,84.5 -16.4,84.5 -15.4,84.5 5.8,84.5 6.8,84.5 7.8,84.5 16.6,84.5 17.6,84.5 18.6,84.5 21.8,84.5 22.8,84.5 23.8,84.5 32.6,84.5 33.6,84.5 34.6,84.5 -47.6,84.6 2.4,84.6 -41.2,85 -39.5,85 -37.8,85 -36.1,85 -34.4,85 -25.2,85 -23.5,85 -21.8,85 -20.1,85 -18.4,85 8.8,85 10.5,85 12.2,85 13.9,85 15.6,85 24.8,85 26.5,85 28.2,85 29.9,85 31.6,85 -47.6,86.533 2.4,86.533 -47.6,88.467 2.4,88.467 -41.2,90 -39.5,90 -37.8,90 -36.1,90 -34.4,90 -25.2,90 -23.5,90 -21.8,90 -20.1,90 -18.4,90 8.8,90 10.5,90 12.2,90 13.9,90 15.6,90 24.8,90 26.5,90 28.2,90 29.9,90 31.6,90 -47.6,90.4 2.4,90.4 -44.2,90.5 -43.2,90.5 -42.2,90.5 -33.4,90.5 -32.4,90.5 -31.4,90.5 -28.2,90.5 -27.2,90.5 -26.2,90.5 -17.4,90.5 -16.4,90.5 -15.4,90.5 5.8,90.5 6.8,90.5 7.8,90.5 16.6,90.5 17.6,90.5 18.6,90.5 21.8,90.5 22.8,90.5 23.8,90.5 32.6,90.5 33.6,90.5 34.6,90.5 -45.2,91.5 -44.2,91.5 -43.2,91.5 -32.4,91.5 -31.4,91.5 -30.4,91.5 -29.2,91.5 -28.2,91.5 -27.2,91.5 -16.4,91.5 -15.4,91.5 -14.4,91.5 -13.2,91.5 -12.2,91.5 -11.2,91.5 -5.2,91.5 -4.2,91.5 -3.2,91.5 4.8,91.5 5.8,91.5 6.8,91.5 17.6,91.5 18.6,91.5 19.6,91.5 20.8,91.5 21.8,91.5 22.8,91.5 33.6,91.5 34.6,91.5 35.6,91.5 36.8,91.5 37.8,91.5 38.8,91.5 44.8,91.5 45.8,91.5 46.8,91.5 -47.6,92.4 2.4,92.4 -47.6,93.5 2.4,93.5 -47.6,94.6 2.4,94.6 -40.4,95.5 -39.4,95.5 -38.4,95.5 -37.2,95.5 -36.2,95.5 -35.2,95.5 -24.4,95.5 -23.4,95.5 -22.4,95.5 -21.2,95.5 -20.2,95.5 -19.2,95.5 -8.4,95.5 -7.4,95.5 -6.4,95.5 9.6,95.5 10.6,95.5 11.6,95.5 12.8,95.5 13.8,95.5 14.8,95.5 25.6,95.5 26.6,95.5 27.6,95.5 28.8,95.5 29.8,95.5 30.8,95.5 41.6,95.5 42.6,95.5 43.6,95.5 -46.4,95.8 3.6,95.8 -41.4,96.5 -40.4,96.5 -39.4,96.5 -36.2,96.5 -35.2,96.5 -34.2,96.5 -25.4,96.5 -24.4,96.5 -23.4,96.5 -20.2,96.5 -19.2,96.5 -18.2,96.5 -9.4,96.5 -8.4,96.5 -7.4,96.5 8.6,96.5 9.6,96.5 10.6,96.5 13.8,96.5 14.8,96.5 15.8,96.5 24.6,96.5 25.6,96.5 26.6,96.5 29.8,96.5 30.8,96.5 31.8,96.5 40.6,96.5 41.6,96.5 42.6,96.5 -45.2,97 -43.2,97 -33.2,97 -31.5,97 -29.8,97 -28.1,97 -26.4,97 -17.2,97 -15.5,97 -13.8,97 -12.1,97 -10.4,97 4.8,97 6.8,97 16.8,97 18.5,97 20.2,97 21.9,97 23.6,97 32.8,97 34.5,97 36.2,97 37.9,97 39.6,97

## Keep-outs
Keep-Out Layer:
  lines w0.2: 0,100 0,75 ; -50,25 -50,0 0,0 ; -50,25 -50,50 ; -50,25 0,25 ; -50,50 0,50 ; -50,50 -50,75 ; -50,75 0,75 ; -50,75 -50,100 50,100 50,75 ; 0,0 0,25 ; 0,0 50,0 50,25 ; 0,25 50,25 ; 0,25 0,50 ; 0,50 0,75 ; 0,50 50,50 ; 0,75 50,75 ; 50,25 50,50 ; 50,50 50,75

## Other copper
Top Layer:
  drawing of 152 lines, arcs and shapes, not listed
Bottom Layer:
  rectangle: -21.5,0.4 -0.4,6.2
  rectangle: -29.5,6.8 -14.1,12.2
  rectangle: -37.5,0.4 -22.1,6.2
  rectangle: -45.5,6.8 -30.1,12.2
  rectangle: -45.5,12.8 -30.1,18.2
  rectangle: -37.5,18.8 -22.1,24.6
  rectangle: -21.5,18.8 -0.4,24.6
  rectangle: -29.5,12.8 -14.1,18.2
  rectangle: -29.5,37.8 -14.1,43.2
  rectangle: -21.5,43.8 -0.4,49.6
  rectangle: -37.5,43.8 -22.1,49.6
  rectangle: -45.5,37.8 -30.1,43.2
  rectangle: -45.5,31.8 -30.1,37.2
  rectangle: -37.5,25.4 -22.1,31.2
  rectangle: -29.5,31.8 -14.1,37.2
  rectangle: -21.5,25.4 -0.4,31.2
  rectangle: -29.5,62.8 -14.1,68.2
  rectangle: -21.5,68.8 -0.4,74.6
  rectangle: -37.5,68.8 -22.1,74.6
  rectangle: -45.5,62.8 -30.1,68.2
  rectangle: -45.5,56.8 -30.1,62.2
  rectangle: -37.5,50.4 -22.1,56.2
  rectangle: -29.5,56.8 -14.1,62.2
  rectangle: -21.5,50.4 -0.4,56.2
  rectangle: -29.5,87.8 -14.1,93.2
  rectangle: -21.5,93.8 -0.4,99.6
  rectangle: -37.5,93.8 -22.1,99.6
  rectangle: -45.5,87.8 -30.1,93.2
  rectangle: -45.5,81.8 -30.1,87.2
  rectangle: -37.5,75.4 -22.1,81.2
  rectangle: -29.5,81.8 -14.1,87.2
  rectangle: -21.5,75.4 -0.4,81.2
  rectangle: 28.5,75.4 49.6,81.2
  rectangle: 20.5,81.8 35.9,87.2
  rectangle: 12.5,75.4 27.9,81.2
  rectangle: 4.5,81.8 19.9,87.2
  rectangle: 4.5,87.8 19.9,93.2
  rectangle: 12.5,93.8 27.9,99.6
  rectangle: 28.5,93.8 49.6,99.6
  rectangle: 20.5,87.8 35.9,93.2
  rectangle: 28.5,50.4 49.6,56.2
  rectangle: 20.5,56.8 35.9,62.2
  rectangle: 12.5,50.4 27.9,56.2
  rectangle: 4.5,56.8 19.9,62.2
  rectangle: 4.5,62.8 19.9,68.2
  rectangle: 12.5,68.8 27.9,74.6
  rectangle: 28.5,68.8 49.6,74.6
  rectangle: 20.5,62.8 35.9,68.2
  rectangle: 28.5,25.4 49.6,31.2
  rectangle: 20.5,31.8 35.9,37.2
  rectangle: 12.5,25.4 27.9,31.2
  rectangle: 4.5,31.8 19.9,37.2
  rectangle: 4.5,37.8 19.9,43.2
  rectangle: 12.5,43.8 27.9,49.6
  rectangle: 28.5,43.8 49.6,49.6
  rectangle: 20.5,37.8 35.9,43.2
  rectangle: 20.5,12.8 35.9,18.2
  rectangle: 28.5,18.8 49.6,24.6
  rectangle: 12.5,18.8 27.9,24.6
  rectangle: 4.5,12.8 19.9,18.2
  rectangle: 4.5,6.8 19.9,12.2
  rectangle: 12.5,0.4 27.9,6.2
  rectangle: 20.5,6.8 35.9,12.2
  rectangle: 28.5,0.4 49.6,6.2
  region: -38.1,6.2 -46.1,6.2 -46.1,18.8 -38.1,18.8 -38.1,24.6 -49.6,24.6 -49.6,0.4 -38.1,0.4
  region: -13.5,18.2 -6.1,18.2 -6.1,16.2 -8.5,16.2 -8.5,12.8 -13.5,12.8
  region: -13.5,12.2 -8.5,12.2 -8.5,8.7 -6.1,8.7 -6.1,6.8 -13.5,6.8
  region: -5.5,18.2 -5.5,16.2 -3.5,16.2 -2.5,16.2 -2.5,12.8 -0.4,12.8 -0.4,18.2
  region: -5.5,6.8 -5.5,8.7 -2.5,8.7 -2.5,12.2 -0.4,12.2 -0.4,6.8
  region: -5.5,31.8 -5.5,33.7 -2.5,33.7 -2.5,37.2 -0.4,37.2 -0.4,31.8
  region: -5.5,43.2 -5.5,41.2 -3.5,41.2 -2.5,41.2 -2.5,37.8 -0.4,37.8 -0.4,43.2
  region: -13.5,37.2 -8.5,37.2 -8.5,33.7 -6.1,33.7 -6.1,31.8 -13.5,31.8
  region: -13.5,43.2 -6.1,43.2 -6.1,41.2 -8.5,41.2 -8.5,37.8 -13.5,37.8
  region: -38.1,31.2 -46.1,31.2 -46.1,43.8 -38.1,43.8 -38.1,49.6 -49.6,49.6 -49.6,25.4 -38.1,25.4
  region: -5.5,56.8 -5.5,58.7 -2.5,58.7 -2.5,62.2 -0.4,62.2 -0.4,56.8
  region: -5.5,68.2 -5.5,66.2 -3.5,66.2 -2.5,66.2 -2.5,62.8 -0.4,62.8 -0.4,68.2
  region: -13.5,62.2 -8.5,62.2 -8.5,58.7 -6.1,58.7 -6.1,56.8 -13.5,56.8
  region: -13.5,68.2 -6.1,68.2 -6.1,66.2 -8.5,66.2 -8.5,62.8 -13.5,62.8
  region: -38.1,56.2 -46.1,56.2 -46.1,68.8 -38.1,68.8 -38.1,74.6 -49.6,74.6 -49.6,50.4 -38.1,50.4
  region: -5.5,81.8 -5.5,83.7 -2.5,83.7 -2.5,87.2 -0.4,87.2 -0.4,81.8
  region: -5.5,93.2 -5.5,91.2 -3.5,91.2 -2.5,91.2 -2.5,87.8 -0.4,87.8 -0.4,93.2
  region: -13.5,87.2 -8.5,87.2 -8.5,83.7 -6.1,83.7 -6.1,81.8 -13.5,81.8
  region: -13.5,93.2 -6.1,93.2 -6.1,91.2 -8.5,91.2 -8.5,87.8 -13.5,87.8
  region: -38.1,81.2 -46.1,81.2 -46.1,93.8 -38.1,93.8 -38.1,99.6 -49.6,99.6 -49.6,75.4 -38.1,75.4
  region: 11.9,81.2 3.9,81.2 3.9,93.8 11.9,93.8 11.9,99.6 0.4,99.6 0.4,75.4 11.9,75.4
  region: 36.5,93.2 43.9,93.2 43.9,91.2 41.5,91.2 41.5,87.8 36.5,87.8
  region: 36.5,87.2 41.5,87.2 41.5,83.7 43.9,83.7 43.9,81.8 36.5,81.8
  region: 44.5,93.2 44.5,91.2 46.5,91.2 47.5,91.2 47.5,87.8 49.6,87.8 49.6,93.2
  region: 44.5,81.8 44.5,83.7 47.5,83.7 47.5,87.2 49.6,87.2 49.6,81.8
  region: 11.9,56.2 3.9,56.2 3.9,68.8 11.9,68.8 11.9,74.6 0.4,74.6 0.4,50.4 11.9,50.4
  region: 36.5,68.2 43.9,68.2 43.9,66.2 41.5,66.2 41.5,62.8 36.5,62.8
  region: 36.5,62.2 41.5,62.2 41.5,58.7 43.9,58.7 43.9,56.8 36.5,56.8
  region: 44.5,68.2 44.5,66.2 46.5,66.2 47.5,66.2 47.5,62.8 49.6,62.8 49.6,68.2
  region: 44.5,56.8 44.5,58.7 47.5,58.7 47.5,62.2 49.6,62.2 49.6,56.8
  region: 11.9,31.2 3.9,31.2 3.9,43.8 11.9,43.8 11.9,49.6 0.4,49.6 0.4,25.4 11.9,25.4
  region: 36.5,43.2 43.9,43.2 43.9,41.2 41.5,41.2 41.5,37.8 36.5,37.8
  region: 36.5,37.2 41.5,37.2 41.5,33.7 43.9,33.7 43.9,31.8 36.5,31.8
  region: 44.5,43.2 44.5,41.2 46.5,41.2 47.5,41.2 47.5,37.8 49.6,37.8 49.6,43.2
  region: 44.5,31.8 44.5,33.7 47.5,33.7 47.5,37.2 49.6,37.2 49.6,31.8
  region: 44.5,6.8 44.5,8.7 47.5,8.7 47.5,12.2 49.6,12.2 49.6,6.8
  region: 44.5,18.2 44.5,16.2 46.5,16.2 47.5,16.2 47.5,12.8 49.6,12.8 49.6,18.2
  region: 36.5,12.2 41.5,12.2 41.5,8.7 43.9,8.7 43.9,6.8 36.5,6.8
  region: 36.5,18.2 43.9,18.2 43.9,16.2 41.5,16.2 41.5,12.8 36.5,12.8
  region: 11.9,6.2 3.9,6.2 3.9,18.8 11.9,18.8 11.9,24.6 0.4,24.6 0.4,0.4 11.9,0.4

## Silkscreen, mask and mechanical layers (free items; w line width, h text height)
Top Overlay:
  text "W" at -13.3,89.6 h1.52 r90
  text "W" at 36.7,89.6 h1.52 r90
  text "+" at -2.1,87 h1.52 r270
  text "+" at 47.9,87 h1.52 r270
  text "C" at -13.3,84.5 h1.52 r90
  text "C" at 36.7,84.5 h1.52 r90
  text "Peng Won" at -12.5,76.1 h1.52
  text "Peng Won" at 37.5,76.1 h1.52
  text "W" at -13.3,64.6 h1.52 r90
  text "W" at 36.7,64.6 h1.52 r90
  text "+" at -2.1,62 h1.52 r270
  text "+" at 47.9,62 h1.52 r270
  text "C" at -13.3,59.5 h1.52 r90
  text "C" at 36.7,59.5 h1.52 r90
  text "Peng Won" at -12.5,51.1 h1.52
  text "Peng Won" at 37.5,51.1 h1.52
  text "W" at -13.3,39.6 h1.52 r90
  text "W" at 36.7,39.6 h1.52 r90
  text "+" at -2.1,37 h1.52 r270
  text "+" at 47.9,37 h1.52 r270
  text "C" at -13.3,34.5 h1.52 r90
  text "C" at 36.7,34.5 h1.52 r90
  text "Peng Won" at -12.5,26.1 h1.52
  text "Peng Won" at 37.5,26.1 h1.52
  text "W" at -13.3,14.6 h1.52 r90
  text "W" at 36.7,14.6 h1.52 r90
  text "+" at -2.1,12 h1.52 r270
  text "+" at 47.9,12 h1.52 r270
  text "C" at -13.3,9.5 h1.52 r90
  text "C" at 36.7,9.5 h1.52 r90
  text "Peng Won" at -12.5,1.1 h1.52
  text "Peng Won" at 37.5,1.1 h1.52
Bottom Solder:
  drawing of 104 lines, arcs and shapes, not listed